# EAGLE board CT_schematic (EAGLE 7.6.0)

Size 100 x 80 mm. Coordinates in mm from the lower left corner, seen from the top.
Outline: 0,0 100,0 100,80 0,80 0,0
Copper layers (1*16): Top 0.035mm / dielectric 1.5mm / Bottom 0.035mm
Design rules "default": minimum track width 10mil, minimum drill 24mil, track to track 8mil, track to pad 8mil, pad to pad 8mil, via to via 8mil, smd to smd 8mil, copper to edge 40mil, drill to drill 8mil, minimum pad ring 10mil, minimum via ring 8mil, stop-mask expansion 4mil, vias tented up to drill 0mil, thermal gap 10mil

## Footprints (pad centres in the part's own frame; a part is rotated, then mirrored left to right if it is on the bottom)
C0603 = smd 0.8 x 0.8: 1 -0.762,0; 2 0.762,0
C0402 = smd 0.5 x 0.5: 1 -0.508,0; 2 0.508,0
C0805 = smd 1.2 x 1.3: 1 -1.016,0; 2 1.016,0
C1210 = smd 1.2 x 2.5: 1 -1.524,0; 2 1.524,0
C1206 = smd 1.3 x 1.6: 1 -1.524,0; 2 1.524,0
EXV-9H = smd 3.505 x 1.676: 1 -2.857,0; 2 2.857,0
L0603 = smd 0.8 x 0.8: 1 -0.762,0; 2 0.762,0
R0603 = smd 0.8 x 0.8: 1 -0.762,0; 2 0.762,0
L1210 = smd 1.2 x 2.5: 1 -1.524,0; 2 1.524,0
PJ-037B_PACKAGE = drill 3.7 square: 1 12,0 | drill 3.2 square: 2 6,0
LQFP208 = smd 0.3 x 1.2: 1 -12.75,-14.4; 2 -12.25,-14.4; 3 -11.75,-14.4; 4 -11.25,-14.4; 5 -10.75,-14.4; 6 -10.25,-14.4; 7 -9.75,-14.4; 8 -9.25,-14.4; 9 -8.75,-14.4; 10 -8.25,-14.4; 11 -7.75,-14.4; 12 -7.25,-14.4; 13 -6.75,-14.4; 14 -6.25,-14.4; 15 -5.75,-14.4; 16 -5.25,-14.4; 17 -4.75,-14.4; 18 -4.25,-14.4; 19 -3.75,-14.4; 20 -3.25,-14.4; 21 -2.75,-14.4; 22 -2.25,-14.4; 23 -1.75,-14.4; 24 -1.25,-14.4; 25 -0.75,-14.4; 26 -0.25,-14.4; 27 0.25,-14.4; 28 0.75,-14.4; 29 1.25,-14.4; 30 1.75,-14.4; 31 2.25,-14.4; 32 2.75,-14.4; 33 3.25,-14.4; 34 3.75,-14.4; 35 4.25,-14.4; 36 4.75,-14.4; 37 5.25,-14.4; 38 5.75,-14.4; 39 6.25,-14.4; 40 6.75,-14.4; 41 7.25,-14.4; 42 7.75,-14.4; 43 8.25,-14.4; 44 8.75,-14.4; 45 9.25,-14.4; 46 9.75,-14.4; 47 10.25,-14.4; 48 10.75,-14.4; 49 11.25,-14.4; 50 11.75,-14.4; 51 12.25,-14.4; 52 12.75,-14.4; 105 12.75,14.4; 106 12.25,14.4; 107 11.75,14.4; 108 11.25,14.4; 109 10.75,14.4; 110 10.25,14.4; 111 9.75,14.4; 112 9.25,14.4; 113 8.75,14.4; 114 8.25,14.4; 115 7.75,14.4; 116 7.25,14.4; 117 6.75,14.4; 118 6.25,14.4; 119 5.75,14.4; 120 5.25,14.4; 121 4.75,14.4; 122 4.25,14.4; 123 3.75,14.4; 124 3.25,14.4; 125 2.75,14.4; 126 2.25,14.4; 127 1.75,14.4; 128 1.25,14.4; 129 0.75,14.4; 130 0.25,14.4; 131 -0.25,14.4; 132 -0.75,14.4; 133 -1.25,14.4; 134 -1.75,14.4; 135 -2.25,14.4; 136 -2.75,14.4; 137 -3.25,14.4; 138 -3.75,14.4; 139 -4.25,14.4; 140 -4.75,14.4; 141 -5.25,14.4; 142 -5.75,14.4; 143 -6.25,14.4; 144 -6.75,14.4; 145 -7.25,14.4; 146 -7.75,14.4; 147 -8.25,14.4; 148 -8.75,14.4; 149 -9.25,14.4; 150 -9.75,14.4; 151 -10.25,14.4; 152 -10.75,14.4; 153 -11.25,14.4; 154 -11.75,14.4; 155 -12.25,14.4; 156 -12.75,14.4 | smd 1.2 x 0.3: 53 14.4,-12.75; 54 14.4,-12.25; 55 14.4,-11.75; 56 14.4,-11.25; 57 14.4,-10.75; 58 14.4,-10.25; 59 14.4,-9.75; 60 14.4,-9.25; 61 14.4,-8.75; 62 14.4,-8.25; 63 14.4,-7.75; 64 14.4,-7.25; 65 14.4,-6.75; 66 14.4,-6.25; 67 14.4,-5.75; 68 14.4,-5.25; 69 14.4,-4.75; 70 14.4,-4.25; 71 14.4,-3.75; 72 14.4,-3.25; 73 14.4,-2.75; 74 14.4,-2.25; 75 14.4,-1.75; 76 14.4,-1.25; 77 14.4,-0.75; 78 14.4,-0.25; 79 14.4,0.25; 80 14.4,0.75; 81 14.4,1.25; 82 14.4,1.75; 83 14.4,2.25; 84 14.4,2.75; 85 14.4,3.25; 86 14.4,3.75; 87 14.4,4.25; 88 14.4,4.75; 89 14.4,5.25; 90 14.4,5.75; 91 14.4,6.25; 92 14.4,6.75; 93 14.4,7.25; 94 14.4,7.75; 95 14.4,8.25; 96 14.4,8.75; 97 14.4,9.25; 98 14.4,9.75; 99 14.4,10.25; 100 14.4,10.75; 101 14.4,11.25; 102 14.4,11.75; 103 14.4,12.25; 104 14.4,12.75; 157 -14.4,12.75; 158 -14.4,12.25; 159 -14.4,11.75; 160 -14.4,11.25; 161 -14.4,10.75; 162 -14.4,10.25; 163 -14.4,9.75; 164 -14.4,9.25; 165 -14.4,8.75; 166 -14.4,8.25; 167 -14.4,7.75; 168 -14.4,7.25; 169 -14.4,6.75; 170 -14.4,6.25; 171 -14.4,5.75; 172 -14.4,5.25; 173 -14.4,4.75; 174 -14.4,4.25; 175 -14.4,3.75; 176 -14.4,3.25; 177 -14.4,2.75; 178 -14.4,2.25; 179 -14.4,1.75; 180 -14.4,1.25; 181 -14.4,0.75; 182 -14.4,0.25; 183 -14.4,-0.25; 184 -14.4,-0.75; 185 -14.4,-1.25; 186 -14.4,-1.75; 187 -14.4,-2.25; 188 -14.4,-2.75; 189 -14.4,-3.25; 190 -14.4,-3.75; 191 -14.4,-4.25; 192 -14.4,-4.75; 193 -14.4,-5.25; 194 -14.4,-5.75; 195 -14.4,-6.25; 196 -14.4,-6.75; 197 -14.4,-7.25; 198 -14.4,-7.75; 199 -14.4,-8.25; 200 -14.4,-8.75; 201 -14.4,-9.25; 202 -14.4,-9.75; 203 -14.4,-10.25; 204 -14.4,-10.75; 205 -14.4,-11.25; 206 -14.4,-11.75; 207 -14.4,-12.25; 208 -14.4,-12.75
VFBGA48 = smd 0.35 x 0.35: A1 -1.875,2.625; A2 -1.125,2.625; A3 -0.375,2.625; A4 0.375,2.625; A5 1.125,2.625; A6 1.875,2.625; B1 -1.875,1.875; B2 -1.125,1.875; B3 -0.375,1.875; B4 0.375,1.875; B5 1.125,1.875; B6 1.875,1.875; C1 -1.875,1.125; C2 -1.125,1.125; C3 -0.375,1.125; C4 0.375,1.125; C5 1.125,1.125; C6 1.875,1.125; D1 -1.875,0.375; D2 -1.125,0.375; D3 -0.375,0.375; D4 0.375,0.375; D5 1.125,0.375; D6 1.875,0.375; E1 -1.875,-0.375; E2 -1.125,-0.375; E3 -0.375,-0.375; E4 0.375,-0.375; E5 1.125,-0.375; E6 1.875,-0.375; F1 -1.875,-1.125; F2 -1.125,-1.125; F3 -0.375,-1.125; F4 0.375,-1.125; F5 1.125,-1.125; F6 1.875,-1.125; G1 -1.875,-1.875; G2 -1.125,-1.875; G3 -0.375,-1.875; G4 0.375,-1.875; G5 1.125,-1.875; G6 1.875,-1.875; H1 -1.875,-2.625; H2 -1.125,-2.625; H3 -0.375,-2.625; H4 0.375,-2.625; H5 1.125,-2.625; H6 1.875,-2.625
TST-110-05-T-D-RA = drill 1 pad 1.7 square: 1 0,0 | drill 1 pad 1.7: 2 0,2.54; 3 2.54,0; 4 2.54,2.54; 5 5.08,0; 6 5.08,2.54; 7 7.62,0; 8 7.62,2.54; 9 10.16,0; 10 10.16,2.54; 11 12.7,0; 12 12.7,2.54; 13 15.24,0; 14 15.24,2.54; 15 17.78,0; 16 17.78,2.54; 17 20.32,0; 18 20.32,2.54; 19 22.86,0; 20 22.86,2.54
QFN-32 = smd 0.6 x 0.3: 1 -2.3,1.75; 2 -2.3,1.25; 3 -2.3,0.75; 4 -2.3,0.25; 5 -2.3,-0.25; 6 -2.3,-0.75; 7 -2.3,-1.25; 8 -2.3,-1.75; 17 2.3,-1.75; 18 2.3,-1.25; 19 2.3,-0.75; 20 2.3,-0.25; 21 2.3,0.25; 22 2.3,0.75; 23 2.3,1.25; 24 2.3,1.75 | smd 0.3 x 0.6: 9 -1.75,-2.3; 10 -1.25,-2.3; 11 -0.75,-2.3; 12 -0.25,-2.3; 13 0.25,-2.3; 14 0.75,-2.3; 15 1.25,-2.3; 16 1.75,-2.3; 25 1.75,2.3; 26 1.25,2.3; 27 0.75,2.3; 28 0.25,2.3; 29 -0.25,2.3; 30 -0.75,2.3; 31 -1.25,2.3; 32 -1.75,2.3 | smd 3.2 x 3.2: EXP 0,0
7498011122R = smd 0.71 x 2.29: 1 -3.545,-3.18; 2 -2.525,-3.18; 3 -1.505,-3.18; 4 -0.485,-3.18; 5 0.535,-3.18; 6 1.555,-3.18; 8 3.595,-3.18; 9 5.635,-3.18; 10 6.655,-3.18; 11 -6.605,-3.18; 12 -5.585,-3.18 | smd 1.4 x 2.54: 13 -8.51,10.2; 14 8.51,10.2 | hole 1.4: -3.5,0; 3.5,0
LH430WV2-SD01 = smd 0.23 x 0.7: 1 0,0; 2 -0.4,0; 3 -0.8,0; 4 -1.2,0; 5 -1.6,0; 6 -2,0; 7 -2.4,0; 8 -2.8,0; 9 -3.2,0; 10 -3.6,0; 11 -4,0; 12 -4.4,0; 13 -4.8,0; 14 -5.2,0; 15 -5.6,0; 16 -5.6,-2.15; 17 -5.2,-2.15; 18 -4.8,-2.15; 19 -4.4,-2.15; 20 -4,-2.15; 21 -3.6,-2.15; 22 -3.2,-2.15; 23 -2.8,-2.15; 24 -2.4,-2.15; 25 -2,-2.15; 26 -1.6,-2.15; 27 -1.2,-2.15; 28 -0.8,-2.15; 29 -0.4,-2.15; 30 0,-2.15
ABLS-25.000MHZ-B2F-T = smd 5.6 x 2.8: 1 -3.81,0; 2 5.69,0
ASEK = smd 1.4 x 1: 1 -1.1,-0.8; 2 1.1,-0.8; 3 1.1,0.8; 4 -1.1,0.8
ASFL1 = smd 1.7 x 1.5: 1 -1.27,-1.1; 2 1.27,-1.1; 3 1.27,1.1; 4 -1.27,1.1
SOIC-8_EP = smd 1.6 x 0.533: 1 -2.921,1.905; 2 -2.921,0.635; 3 -2.921,-0.635; 4 -2.921,-1.905; 5 2.921,-1.905; 6 2.921,-0.635; 7 2.921,0.635; 8 2.921,1.905 | smd 2.54 x 3.302: EPAD 0,0 | drill 0.406 pad 0.406: P$1 -0.508,0.635; P$2 0.381,0.635; P$3 -0.508,-0.635; P$4 0.381,-0.635
WSON-8 = smd 0.3 x 0.6: 1 -0.75,0; 2 0.05,0; 3 0.85,0; 4 1.65,0; 5 1.65,3.8; 6 0.85,3.8; 7 0.05,3.8; 8 -0.75,3.8 | smd 3 x 2.6: PAD 0.45,1.9
DFN-8_DDB = smd 0.805 x 0.3: 1 -0.952,0.75; 2 -0.952,0.25; 3 -0.952,-0.25; 4 -0.952,-0.75; 5 0.952,-0.75; 6 0.952,-0.25; 7 0.952,0.25; 8 0.952,0.75 | smd 0.61 x 2.2: 9 0,0
SON-6 = smd 0.55 x 0.3: 1 -0.355,0.5 | smd 0.52 x 0.3: 2 -0.37,0; 3 -0.37,-0.5; 4 0.37,-0.5; 5 0.37,0; 6 0.37,0.5
SW_4-1437565-2 = smd 1.4 x 2.1: 1 -2.23,4.55; 2 -2.23,-4.55; 3 2.23,4.55; 4 2.23,-4.55
LGM67K-G1J2-24-Z = smd 0.8 x 1.4: A -2,0; C 0,0
NC7SZ125M5X = smd 1.3 x 0.7: 1 -1.3,0.95; 2 -1.3,0; 3 -1.3,-0.95; 4 1.3,-0.95; 5 1.3,0.95

## Placement (x,y rotation side)
C1  1e-06  [C0603]  -22.86,82.55 0 top  (outside the outline)
C2  1e-07  [C0603]  -26.67,82.55 0 top  (outside the outline)
C3  1e-07  [C0603]  -30.48,82.55 0 top  (outside the outline)
C4  1e-07  [C0603]  -34.29,82.55 0 top  (outside the outline)
C5  1e-07  [C0603]  -38.1,82.55 0 top  (outside the outline)
C6  1e-07  [C0603]  -41.91,82.55 0 top  (outside the outline)
C7  1e-07  [C0603]  -45.72,82.55 0 top  (outside the outline)
C8  1e-07  [C0603]  -49.53,82.55 0 top  (outside the outline)
C9  1e-07  [C0603]  -53.34,82.55 0 top  (outside the outline)
C10  1e-07  [C0603]  -57.15,82.55 0 top  (outside the outline)
C11  1e-07  [C0603]  -60.96,82.55 0 top  (outside the outline)
C12  1e-07  [C0603]  -64.77,82.55 0 top  (outside the outline)
C13  1e-07  [C0603]  -68.58,82.55 0 top  (outside the outline)
C14  1e-07  [C0603]  -72.39,82.55 0 top  (outside the outline)
C15  1e-07  [C0603]  -76.2,82.55 0 top  (outside the outline)
C16  1e-07  [C0603]  -80.01,82.55 0 top  (outside the outline)
C17  1e-07  [C0603]  -83.82,82.55 0 top  (outside the outline)
C18  1e-07  [C0603]  -87.63,82.55 0 top  (outside the outline)
C19  1e-07  [C0603]  -91.44,82.55 0 top  (outside the outline)
C20  4.7e-06  [C0603]  -69.85,77.47 0 top  (outside the outline)
C21  2.2e-06  [C0603]  -73.66,77.47 0 top  (outside the outline)
C22  2.2e-06  [C0603]  -77.47,77.47 0 top  (outside the outline)
C23  1e-08  [C0603]  -15.24,87.63 0 top  (outside the outline)
C24  1e-06  [C0603]  -19.05,87.63 0 top  (outside the outline)
C25  1e-07  [C0603]  -22.86,87.63 0 top  (outside the outline)
C26  2.2e-06  [C0603]  -81.28,77.47 0 top  (outside the outline)
C27  1e-07  [C0402]  -82.55,92.71 0 top  (outside the outline)
C28  2.2e-06  [C0603]  -85.09,77.47 0 top  (outside the outline)
C29  1e-07  [C0402]  -86.36,92.71 0 top  (outside the outline)
C30  1e-07  [C0402]  -90.17,92.71 0 top  (outside the outline)
C31  1e-07  [C0402]  -15.24,97.79 0 top  (outside the outline)
C32  2.2e-06  [C0603]  -88.9,77.47 0 top  (outside the outline)
C33  1e-07  [C0402]  -19.05,97.79 0 top  (outside the outline)
C34  1e-07  [C0402]  -22.86,97.79 0 top  (outside the outline)
C35  1e-05  [C0805]  -66.04,71.12 0 top  (outside the outline)
C36  1e-07  [C0402]  -26.67,97.79 0 top  (outside the outline)
C37  2.2e-11  [C0402]  -74.93,92.71 0 top  (outside the outline)
C38  2.2e-11  [C0402]  -78.74,92.71 0 top  (outside the outline)
C39  1e-07  [C0402]  -30.48,97.79 0 top  (outside the outline)
C40  1e-07  [C0402]  -34.29,97.79 0 top  (outside the outline)
C41  1e-07  [C0402]  -38.1,97.79 0 top  (outside the outline)
C42  1e-07  [C0402]  -41.91,97.79 0 top  (outside the outline)
C43  1e-07  [C0402]  -45.72,97.79 0 top  (outside the outline)
C44  1e-08  [C0402]  -49.53,97.79 0 top  (outside the outline)
C45  1e-08  [C0402]  -53.34,97.79 0 top  (outside the outline)
C46  1e-08  [C0402]  -57.15,97.79 0 top  (outside the outline)
C47  1e-05  [C1210]  -58.42,64.77 0 top  (outside the outline)
C48  1e-05  [C1210]  -64.77,64.77 0 top  (outside the outline)
C49  1e-05  [C1210]  -71.12,64.77 0 top  (outside the outline)
C50  1e-05  [C1210]  -77.47,64.77 0 top  (outside the outline)
C51  1e-08  [C0402]  -60.96,97.79 0 top  (outside the outline)
C52  1e-05  [C1206]  -29.21,71.12 0 top  (outside the outline)
C53  1e-05  [C1210]  -83.82,64.77 0 top  (outside the outline)
C54  1e-08  [C0402]  -64.77,97.79 0 top  (outside the outline)
C55  1e-05  [C1206]  -35.56,71.12 0 top  (outside the outline)
C56  1e-05  [C1210]  -90.17,64.77 0 top  (outside the outline)
C57  1e-05  [C1210]  -16.51,71.12 0 top  (outside the outline)
C58  2.2e-06  [C0603]  -15.24,82.55 0 top  (outside the outline)
C59  2.2e-07  [C0603]  -19.05,82.55 0 top  (outside the outline)
C60  1e-07  [C0402]  -68.58,97.79 0 top  (outside the outline)
C61  0.0001  [EXV-9H]  -74.93,57.15 0 top  (outside the outline)
C62  0.0001  [EXV-9H]  -86.36,57.15 0 top  (outside the outline)
C63  1e-08  [C0402]  -72.39,97.79 0 top  (outside the outline)
C64  1e-08  [C0402]  -76.2,97.79 0 top  (outside the outline)
C65  1e-08  [C0402]  -80.01,97.79 0 top  (outside the outline)
C66  1e-08  [C0402]  -83.82,97.79 0 top  (outside the outline)
F1  240.0  [L0603]  -26.67,87.63 0 top  (outside the outline)
I1  97.0  [R0603]  -30.48,87.63 0 top  (outside the outline)
I5  1e-05  [L1210]  -22.86,71.12 0 top  (outside the outline)
J1  PJ-037B  [PJ-037B_PACKAGE]  -77.47,7.62 0 top  (outside the outline)
R2  1000.0  [R0603]  -34.29,87.63 0 top  (outside the outline)
R4  4700.0  [R0603]  -38.1,87.63 0 top  (outside the outline)
R5  4700.0  [R0603]  -41.91,87.63 0 top  (outside the outline)
R6  4700.0  [R0603]  -45.72,87.63 0 top  (outside the outline)
R7  2200.0  [R0603]  -49.53,87.63 0 top  (outside the outline)
R8  2200.0  [R0603]  -53.34,87.63 0 top  (outside the outline)
R9  2200.0  [R0603]  -57.15,87.63 0 top  (outside the outline)
R10  10000.0  [R0603]  -20.32,77.47 0 top  (outside the outline)
R11  10000.0  [R0603]  -25.4,77.47 0 top  (outside the outline)
R12  10000.0  [R0603]  -30.48,77.47 0 top  (outside the outline)
R13  10000.0  [R0603]  -35.56,77.47 0 top  (outside the outline)
R14  10000.0  [R0603]  -40.64,77.47 0 top  (outside the outline)
R15  10000.0  [R0603]  -45.72,77.47 0 top  (outside the outline)
R16  10000.0  [R0603]  -50.8,77.47 0 top  (outside the outline)
R17  0.1  [R0603]  -60.96,87.63 0 top  (outside the outline)
R18  0.1  [R0603]  -64.77,87.63 0 top  (outside the outline)
R19  200.0  [R0603]  -68.58,87.63 0 top  (outside the outline)
R20  220.0  [R0603]  -72.39,87.63 0 top  (outside the outline)
R21  6490.0  [R0603]  -76.2,87.63 0 top  (outside the outline)
R22  4700.0  [R0603]  -80.01,87.63 0 top  (outside the outline)
R23  4700.0  [R0603]  -83.82,87.63 0 top  (outside the outline)
R24  1000.0  [R0603]  -87.63,87.63 0 top  (outside the outline)
R25  1000.0  [R0603]  -91.44,87.63 0 top  (outside the outline)
R26  1000.0  [R0603]  -15.24,92.71 0 top  (outside the outline)
R27  4700.0  [R0603]  -19.05,92.71 0 top  (outside the outline)
R28  1000.0  [R0603]  -22.86,92.71 0 top  (outside the outline)
R29  4700.0  [R0603]  -26.67,92.71 0 top  (outside the outline)
R30  1000.0  [R0603]  -30.48,92.71 0 top  (outside the outline)
R31  4700.0  [R0603]  -34.29,92.71 0 top  (outside the outline)
R32  10000.0  [R0603]  -55.88,77.47 0 top  (outside the outline)
R33  910.0  [R0603]  -38.1,92.71 0 top  (outside the outline)
R34  2200.0  [R0603]  -41.91,92.71 0 top  (outside the outline)
R35  100000.0  [R0603]  -76.2,71.12 0 top  (outside the outline)
R36  1800.0  [R0603]  -45.72,92.71 0 top  (outside the outline)
R37  1000.0  [R0603]  -49.53,92.71 0 top  (outside the outline)
R38  100000.0  [R0603]  -81.28,71.12 0 top  (outside the outline)
R39  2231.0  [R0603]  -53.34,92.71 0 top  (outside the outline)
R40  1000.0  [R0603]  -57.15,92.71 0 top  (outside the outline)
R41  100000.0  [R0603]  -86.36,71.12 0 top  (outside the outline)
R42  1600000.0  [R0603]  -71.12,71.12 0 top  (outside the outline)
R43  10000.0  [R0603]  -60.96,77.47 0 top  (outside the outline)
R44  10000.0  [R0603]  -66.04,77.47 0 top  (outside the outline)
R45  9100.0  [R0603]  -60.96,92.71 0 top  (outside the outline)
R46  680000.0  [R0603]  -91.44,71.12 0 top  (outside the outline)
R47  120000.0  [R0603]  -15.24,77.47 0 top  (outside the outline)
U1  STM32F469BGT6  [LQFP208]  -27.94,15.24 0 top  (outside the outline)
U2  CY62147GE30-45BVXI  [VFBGA48]  -29.21,36.83 0 top  (outside the outline)
U3  TST-110-05-T-D-RA  [TST-110-05-T-D-RA]  -46.99,54.61 0 top  (outside the outline)
U4  KSZ8081RNBIA-TR  [QFN-32]  -63.5,35.56 0 top  (outside the outline)
U5  7498011122R  [7498011122R]  -53.34,7.62 0 top  (outside the outline)
U6  LH430WV2-SD01  [LH430WV2-SD01]  -64.77,93.98 0 top  (outside the outline)
U7  ABLS-25.000MHZ-B2F-T  [ABLS-25.000MHZ-B2F-T]  -26.67,64.77 0 top  (outside the outline)
U8  ASEK-32.768KHz-ECST  [ASEK]  -66.04,57.15 0 top  (outside the outline)
U9  ASFL1-25MHZ-NCS  [ASFL1]  -46.99,48.26 0 top  (outside the outline)
U10  ASFL1-50MHZ-NCS  [ASFL1]  -63.5,48.26 0 top  (outside the outline)
U11  MIC5234YME  [SOIC-8_EP]  -38.1,63.5 0 top  (outside the outline)
U12  LP3878SDX-ADJ/NOPB  [WSON-8]  -85.09,33.02 0 top  (outside the outline)
U13  LP3878SDX-ADJ/NOPB  [WSON-8]  -30.48,45.72 0 top  (outside the outline)
U14  LT3494AEDDB#TRMPBF  [DFN-8_DDB]  -87.63,97.79 0 top  (outside the outline)
U15  TPS3895ADRYR  [SON-6]  -13.97,101.6 0 top  (outside the outline)
U16  4-1437565-2  [SW_4-1437565-2]  -46.99,36.83 0 top  (outside the outline)
U17  Q65110A2395  [LGM67K-G1J2-24-Z]  -46.99,64.77 0 top  (outside the outline)
U18  nc7sz125m5x  [NC7SZ125M5X]  -40.64,71.12 0 top  (outside the outline)
U19  nc7sz125m5x  [NC7SZ125M5X]  -46.99,71.12 0 top  (outside the outline)
U20  nc7sz125m5x  [NC7SZ125M5X]  -53.34,71.12 0 top  (outside the outline)
U21  nc7sz125m5x  [NC7SZ125M5X]  -59.69,71.12 0 top  (outside the outline)

## Library data of the parts
C1-C66 F1 I1 I5 J1 R2 R4-R47 U1-U21 = circuit_tree

## Nets
CLK_CRYSTAL_U4_8: C37.1 U4.8 U7.2
CLK_CRYSTAL_U4_9: C38.1 U4.9 U7.1
CLK_U1_9: U1.9 U8.3
CLK_U1_32: U1.32 U9.3
CLK_U1_44: U1.44 U10.3
GND: C1.2 C2.2 C3.2 C4.2 C5.2 C6.2 C7.2 C8.2 C9.2 C10.2 C11.2 C12.2 C13.2 C14.2 C15.2 C16.2 C17.2 C18.2 C19.2 C20.2 C21.2 C22.2 C23.2 C24.2 C25.2 C26.2 C27.2 C28.2 C29.2 C30.2 C31.2 C32.2 C33.2 C34.2 C35.2 C36.2 C37.2 C38.2 C39.2 C40.2 C41.2 C42.2 C43.2 C44.2 C45.2 C46.2 C47.2 C48.2 C49.2 C50.2 C51.2 C52.2 C53.2 C54.2 C55.2 C56.2 C57.2 C58.2 C59.2 C60.2 C61.2 C62.2 C63.2 C64.2 C65.2 C66.2 J1.2 R2.2 R12.2 R17.2 R18.2 R21.2 R23.2 R24.2 R25.2 R26.2 R28.2 R30.2 R32.2 R34.2 R37.2 R40.2 R45.2 R47.2 U1.14 U1.25 U1.40 U1.51 U1.60 U1.72 U1.82 U1.93 U1.114 U1.122 U1.128 U1.136 U1.149 U1.170 U1.184 U1.202 U2.D1 U2.E6 U3.4 U3.6 U3.8 U3.10 U3.12 U3.14 U3.16 U3.18 U3.20 U4.1 U4.EXP U5.1 U5.10 U6.1 U6.6 U6.9 U6.12 U6.15 U6.17 U6.18 U6.19 U6.24 U6.27 U8.2 U9.2 U10.2 U11.7 U11.EPAD U12.3 U12.PAD U13.3 U13.PAD U14.2 U14.9 U15.2 U17.C U18.2 U18.3 U19.1 U19.3 U20.1 U20.3 U21.1 U21.3
NET_U1_34: R6.1 U1.34 U21.4
NET_U1_36: R7.1 U1.36 U4.12
NET_U1_42: C23.1 C24.1 F1.1 U1.41 U1.42
NET_U1_45: R8.1 U1.45 U4.11
NET_U1_63: R12.1 U1.63
NET_U1_92: C21.1 U1.92
NET_U1_125: C26.1 U1.119 U1.125
NET_U1_148: C22.1 U1.148
NET_U1_197: R11.1 U1.197
NET_U1_203: R10.1 U1.203
NET_U1_207: U17.A
NET_U1_208: U16.3 U16.4
NET_U4_2: C32.1 C33.1 U4.2
NET_U4_3: C34.1 I1.1 U4.3
NET_U4_10: R21.1 U4.10
NET_U4_13: R24.1 U4.13
NET_U4_14: R25.1 U4.14
NET_U4_19: R23.1 U4.19
NET_U4_20: R29.1 U4.20
NET_U4_21: R22.1 U4.21
NET_U4_28: R27.1 U4.28
NET_U4_29: R28.1 U4.29
NET_U4_31: R30.1 U4.31
NET_U4_32: R5.1 U4.32 U20.4
NET_U5_1: U4.7 U5.1
NET_U5_2: C30.1 U5.2
NET_U5_3: U4.6 U5.3
NET_U5_4: U4.5 U5.4
NET_U5_5: C31.1 U5.5
NET_U5_6: U4.4 U5.6
NET_U5_8: R18.1 U5.8
NET_U5_9: R19.1 U5.9
NET_U5_12: R20.1 U5.12
NET_U5_13: R17.1 U5.13 U5.14
NET_U5_30: R19.2
NET_U5_31: R20.2
NET_U6_4: R4.1 U6.4 U19.4
NET_U6_5: R9.1
NET_U6_20: R32.1 U6.20
NET_U11_4: R33.2 R34.1 U11.4
NET_U12_1: C51.1 U12.1
NET_U12_6: R36.2 R37.1 U12.6
NET_U12_8: R35.1 U12.8
NET_U13_1: C54.1 U13.1
NET_U13_6: R39.2 R40.1 U13.6
NET_U13_8: R38.1 U13.8
NET_U14_1: I5.1 U14.1
NET_U14_5: R41.1 U14.5
NET_U14_6: R42.1 U14.6
NET_U14_8: C59.1 U14.8
NET_U15_1: R44.1 R45.1 U15.1
NET_U15_3: R46.2 R47.1 U15.3
NET_U15_4: R43.1 U15.4 U18.4 U19.2 U20.2 U21.2
NET_U16_1: R2.1 U16.1 U16.2
PROC_DSIHOST_CKN: U1.124 U6.13
PROC_DSIHOST_CKP: U1.123 U6.14
PROC_DSIHOST_D0N: U1.121 U6.7
PROC_DSIHOST_D0P: U1.120 U6.8
PROC_DSIHOST_D1N: U1.127 U6.10
PROC_DSIHOST_D1P: U1.126 U6.11
PROC_ETH_CRS_DV: U1.56 U4.18
PROC_ETH_RXD0: R31.1 U1.57 U4.16
PROC_ETH_RXD1: R26.1 U1.58 U4.15
PROC_ETH_TX_EN: U1.91 U4.23
PROC_ETH_TXD0: U1.104 U4.24
PROC_ETH_TXD1: U1.105 U4.25
PROC_FMC_A0: U1.16 U2.A3
PROC_FMC_A1: U1.17 U2.A4
PROC_FMC_A2: U1.18 U2.A5
PROC_FMC_A3: U1.22 U2.B3
PROC_FMC_A4: U1.23 U2.B4
PROC_FMC_A5: U1.24 U2.C3
PROC_FMC_A6: U1.71 U2.C4
PROC_FMC_A7: U1.74 U2.D4
PROC_FMC_A8: U1.75 U2.H2
PROC_FMC_A9: U1.76 U2.H3
PROC_FMC_A10: U1.77 U2.H4
PROC_FMC_A11: U1.78 U2.H5
PROC_FMC_A12: U1.129 U2.G3
PROC_FMC_A13: U1.130 U2.G4
PROC_FMC_A14: U1.131 U2.F3
PROC_FMC_A15: U1.132 U2.F4
PROC_FMC_A16: U1.111 U2.E4
PROC_FMC_A17: U1.112 U2.D3
PROC_FMC_D0: U1.116 U2.B6
PROC_FMC_D1: U1.117 U2.C5
PROC_FMC_D2: U1.164 U2.C6
PROC_FMC_D3: U1.165 U2.D5
PROC_FMC_D4: U1.79 U2.E5
PROC_FMC_D5: U1.80 U2.F5
PROC_FMC_D6: U1.81 U2.F6
PROC_FMC_D7: U1.84 U2.G6
PROC_FMC_D8: U1.85 U2.B1
PROC_FMC_D9: U1.86 U2.C1
PROC_FMC_D10: U1.87 U2.C2
PROC_FMC_D11: U1.88 U2.D2
PROC_FMC_D12: U1.89 U2.E2
PROC_FMC_D13: U1.108 U2.F2
PROC_FMC_D14: U1.109 U2.F1
PROC_FMC_D15: U1.110 U2.G1
PROC_FMC_NBL0: U1.200 U2.A1
PROC_FMC_NE2: R14.1 U1.178 U2.B5
PROC_FMC_NOE: R13.1 U1.168 U2.A2
PROC_FMC_NWE: R15.1 U1.169 U2.G5
PROC_SYS_JTCK_SWCLK: U1.159 U3.9
PROC_SYS_JTDO_SWO: U1.192 U3.13
PROC_SYS_JTMS_SWDIO: U1.147 U3.7
RST_OUT_U3_SRESET_B: R16.1 U3.15 U18.1
VCC_S1_7V5: C47.1 C48.1 C52.1 C55.1 C57.1 C61.1 C62.1 I5.2 J1.1 R35.2 R38.2 R41.2 U11.5 U11.8 U12.4 U13.4 U14.3 U14.4
VCC_TIER1_1V5: C49.1 C50.1 R33.1 U6.29 U11.1
VCC_TIER1_2V8: C41.1 C42.1 C43.1 C53.1 R36.1 U6.16 U6.21 U6.22 U6.23 U12.5
VCC_TIER1_3V3: C1.1 C2.1 C3.1 C4.1 C5.1 C6.1 C7.1 C8.1 C9.1 C10.1 C11.1 C12.1 C13.1 C14.1 C15.1 C16.1 C17.1 C18.1 C19.1 C20.1 C25.1 C27.1 C28.1 C29.1 C35.1 C36.1 C39.1 C44.1 C45.1 C46.1 C56.1 C60.1 C63.1 C64.1 C65.1 C66.1 F1.2 I1.2 R4.2 R5.2 R6.2 R7.2 R8.2 R9.2 R10.2 R11.2 R13.2 R14.2 R15.2 R16.2 R22.2 R27.2 R29.2 R31.2 R39.1 R43.2 R44.2 R46.1 U1.6 U1.15 U1.26 U1.39 U1.52 U1.59 U1.73 U1.83 U1.94 U1.103 U1.115 U1.118 U1.137 U1.150 U1.158 U1.171 U1.185 U1.204 U2.D6 U2.E1 U3.1 U4.17 U6.2 U8.4 U9.4 U10.4 U13.5 U15.6 U18.5 U19.5 U20.5 U21.5
VCC_TIER1_12V0: C40.1 C58.1 R42.2 U6.30 U14.7

## Tracks (layer width: path | path; a pad name or v marks a point on that pad's centre or on a via)
CLK_CRYSTAL_U4_8  (2 unrouted)
CLK_CRYSTAL_U4_9  (2 unrouted)
CLK_U1_9  (1 unrouted)
CLK_U1_32  (1 unrouted)
CLK_U1_44  (1 unrouted)
GND  (145 unrouted)
NET_U1_34  (2 unrouted)
NET_U1_36  (2 unrouted)
NET_U1_42  (4 unrouted)
NET_U1_45  (2 unrouted)
NET_U1_63  (1 unrouted)
NET_U1_92  (1 unrouted)
NET_U1_125  (2 unrouted)
NET_U1_148  (1 unrouted)
NET_U1_197  (1 unrouted)
NET_U1_203  (1 unrouted)
NET_U1_208  (1 unrouted)
NET_U4_2  (2 unrouted)
NET_U4_3  (2 unrouted)
NET_U4_10  (1 unrouted)
NET_U4_13  (1 unrouted)
NET_U4_14  (1 unrouted)
NET_U4_19  (1 unrouted)
NET_U4_20  (1 unrouted)
NET_U4_21  (1 unrouted)
NET_U4_28  (1 unrouted)
NET_U4_29  (1 unrouted)
NET_U4_31  (1 unrouted)
NET_U4_32  (2 unrouted)
NET_U5_1  (1 unrouted)
NET_U5_2  (1 unrouted)
NET_U5_3  (1 unrouted)
NET_U5_4  (1 unrouted)
NET_U5_5  (1 unrouted)
NET_U5_6  (1 unrouted)
NET_U5_8  (1 unrouted)
NET_U5_9  (1 unrouted)
NET_U5_12  (1 unrouted)
NET_U5_13  (2 unrouted)
NET_U6_4  (2 unrouted)
NET_U6_20  (1 unrouted)
NET_U11_4  (2 unrouted)
NET_U12_1  (1 unrouted)
NET_U12_6  (2 unrouted)
NET_U12_8  (1 unrouted)
NET_U13_1  (1 unrouted)
NET_U13_6  (2 unrouted)
NET_U13_8  (1 unrouted)
NET_U14_1  (1 unrouted)
NET_U14_5  (1 unrouted)
NET_U14_6  (1 unrouted)
NET_U14_8  (1 unrouted)
NET_U15_1  (2 unrouted)
NET_U15_3  (2 unrouted)
NET_U15_4  (5 unrouted)
NET_U16_1  (2 unrouted)
PROC_DSIHOST_CKN  (1 unrouted)
PROC_DSIHOST_CKP  (1 unrouted)
PROC_DSIHOST_D0N  (1 unrouted)
PROC_DSIHOST_D0P  (1 unrouted)
PROC_DSIHOST_D1N  (1 unrouted)
PROC_DSIHOST_D1P  (1 unrouted)
PROC_ETH_CRS_DV  (1 unrouted)
PROC_ETH_RXD0  (2 unrouted)
PROC_ETH_RXD1  (2 unrouted)
PROC_ETH_TX_EN  (1 unrouted)
PROC_ETH_TXD0  (1 unrouted)
PROC_ETH_TXD1  (1 unrouted)
PROC_FMC_A0  (1 unrouted)
PROC_FMC_A1  (1 unrouted)
PROC_FMC_A2  (1 unrouted)
PROC_FMC_A3  (1 unrouted)
PROC_FMC_A4  (1 unrouted)
PROC_FMC_A5  (1 unrouted)
PROC_FMC_A6  (1 unrouted)
PROC_FMC_A7  (1 unrouted)
PROC_FMC_A8  (1 unrouted)
PROC_FMC_A9  (1 unrouted)
PROC_FMC_A10  (1 unrouted)
PROC_FMC_A11  (1 unrouted)
PROC_FMC_A12  (1 unrouted)
PROC_FMC_A13  (1 unrouted)
PROC_FMC_A14  (1 unrouted)
PROC_FMC_A15  (1 unrouted)
PROC_FMC_A16  (1 unrouted)
PROC_FMC_A17  (1 unrouted)
PROC_FMC_D0  (1 unrouted)
PROC_FMC_D1  (1 unrouted)
PROC_FMC_D2  (1 unrouted)
PROC_FMC_D3  (1 unrouted)
PROC_FMC_D4  (1 unrouted)
PROC_FMC_D5  (1 unrouted)
PROC_FMC_D6  (1 unrouted)
PROC_FMC_D7  (1 unrouted)
PROC_FMC_D8  (1 unrouted)
PROC_FMC_D9  (1 unrouted)
PROC_FMC_D10  (1 unrouted)
PROC_FMC_D11  (1 unrouted)
PROC_FMC_D12  (1 unrouted)
PROC_FMC_D13  (1 unrouted)
PROC_FMC_D14  (1 unrouted)
PROC_FMC_D15  (1 unrouted)
PROC_FMC_NBL0  (1 unrouted)
PROC_FMC_NE2  (2 unrouted)
PROC_FMC_NOE  (2 unrouted)
PROC_FMC_NWE  (2 unrouted)
PROC_SYS_JTCK_SWCLK  (1 unrouted)
PROC_SYS_JTDO_SWO  (1 unrouted)
PROC_SYS_JTMS_SWDIO  (1 unrouted)
RST_OUT_U3_SRESET_B  (2 unrouted)
VCC_S1_7V5  (17 unrouted)
VCC_TIER1_1V5  (4 unrouted)
VCC_TIER1_2V8  (9 unrouted)
VCC_TIER1_3V3  (89 unrouted)
VCC_TIER1_12V0  (4 unrouted)